# Altium PCB UV16 PDU.PcbDoc
Units mm, origin at the board's own origin, x right, y up, seen from the top; angles counter-clockwise.
Board outline 100 x 90 mm, 2 copper layers (Top Layer, Bottom Layer), stack 1.595 mm thick; 66 components, 57 nets, 215 pads, 97 vias.
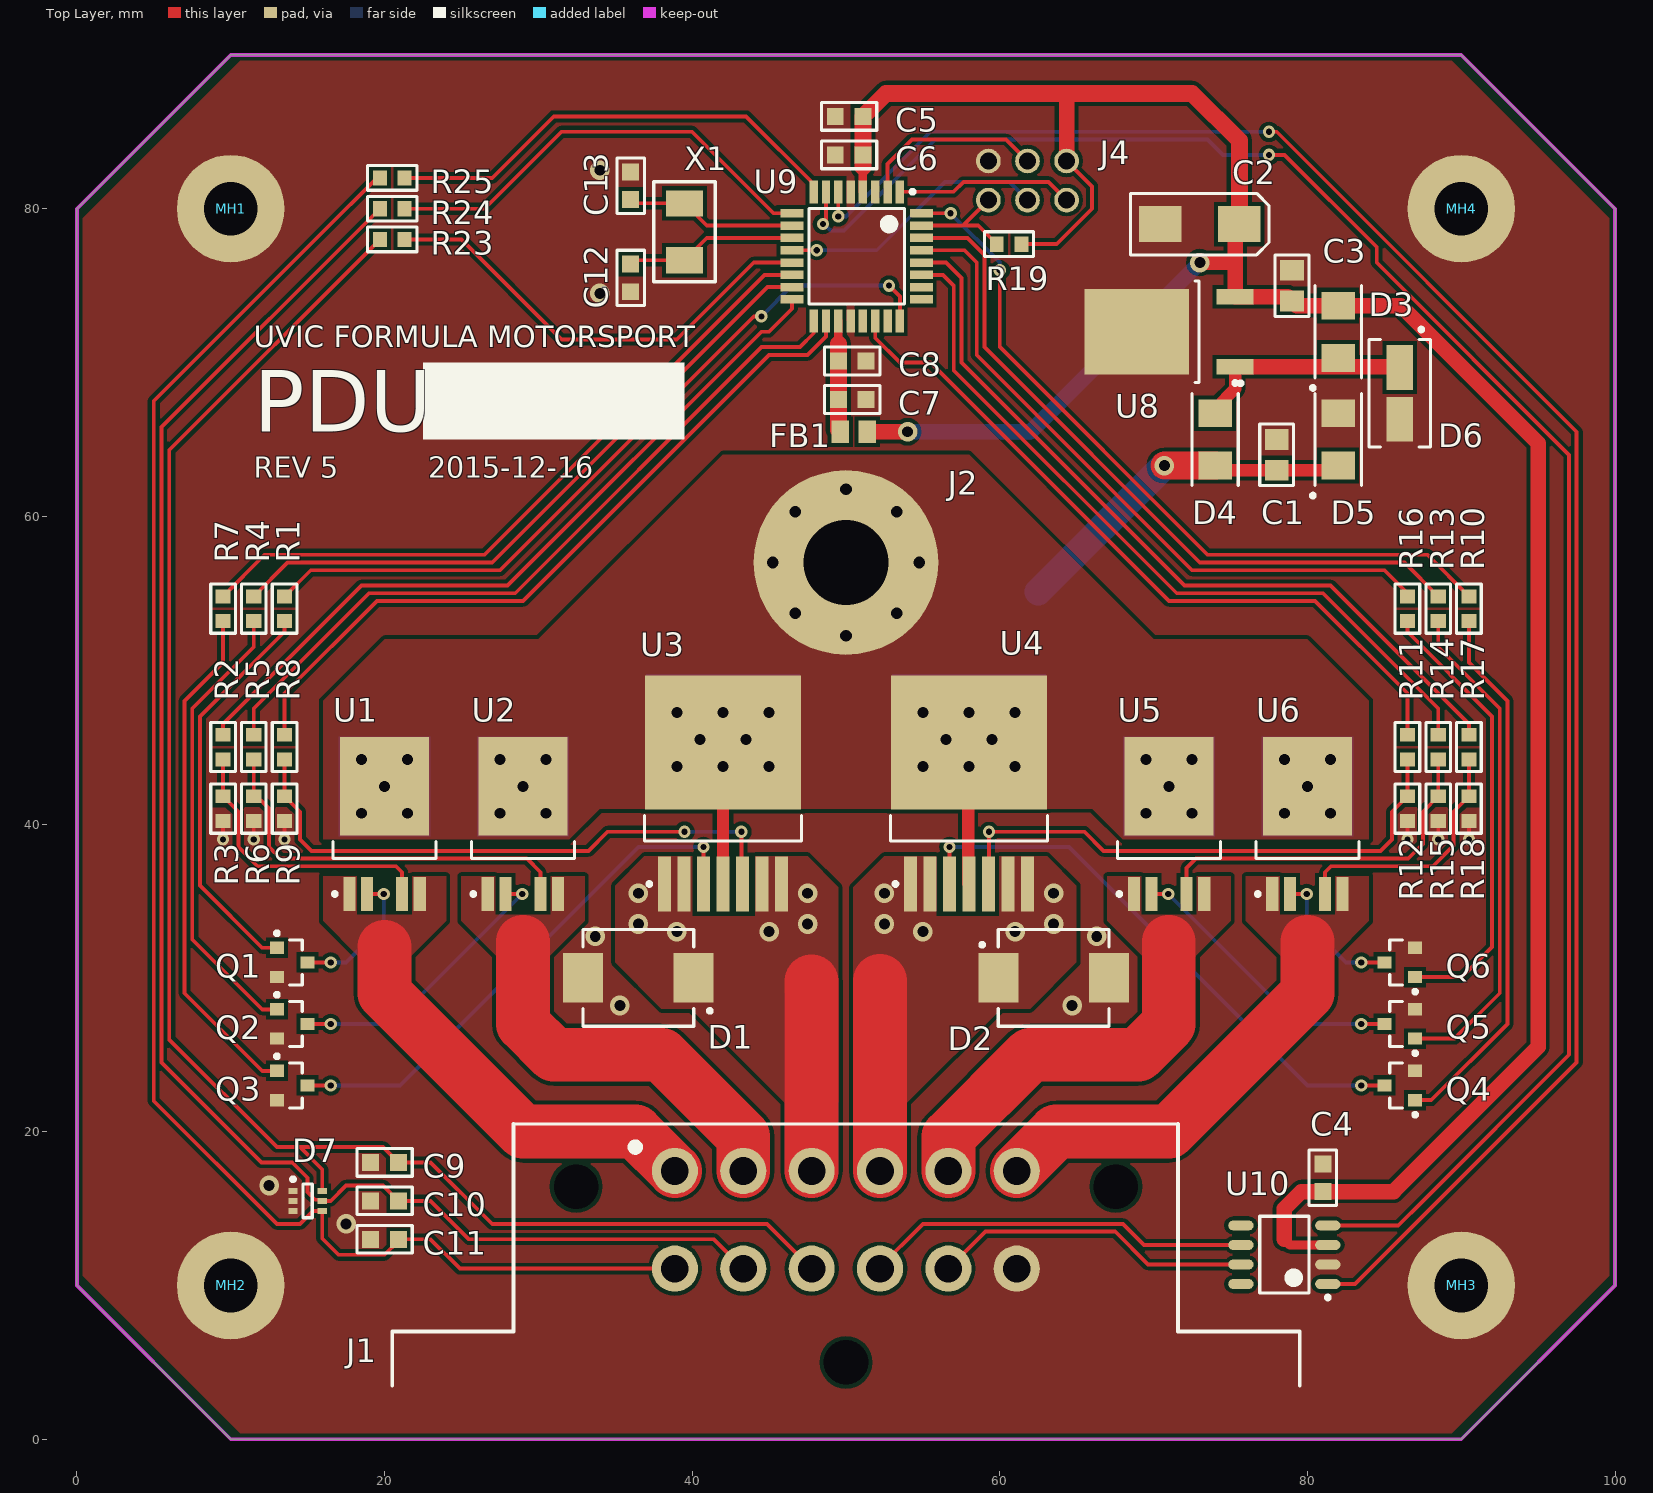
[diagram p0: Top Layer view]
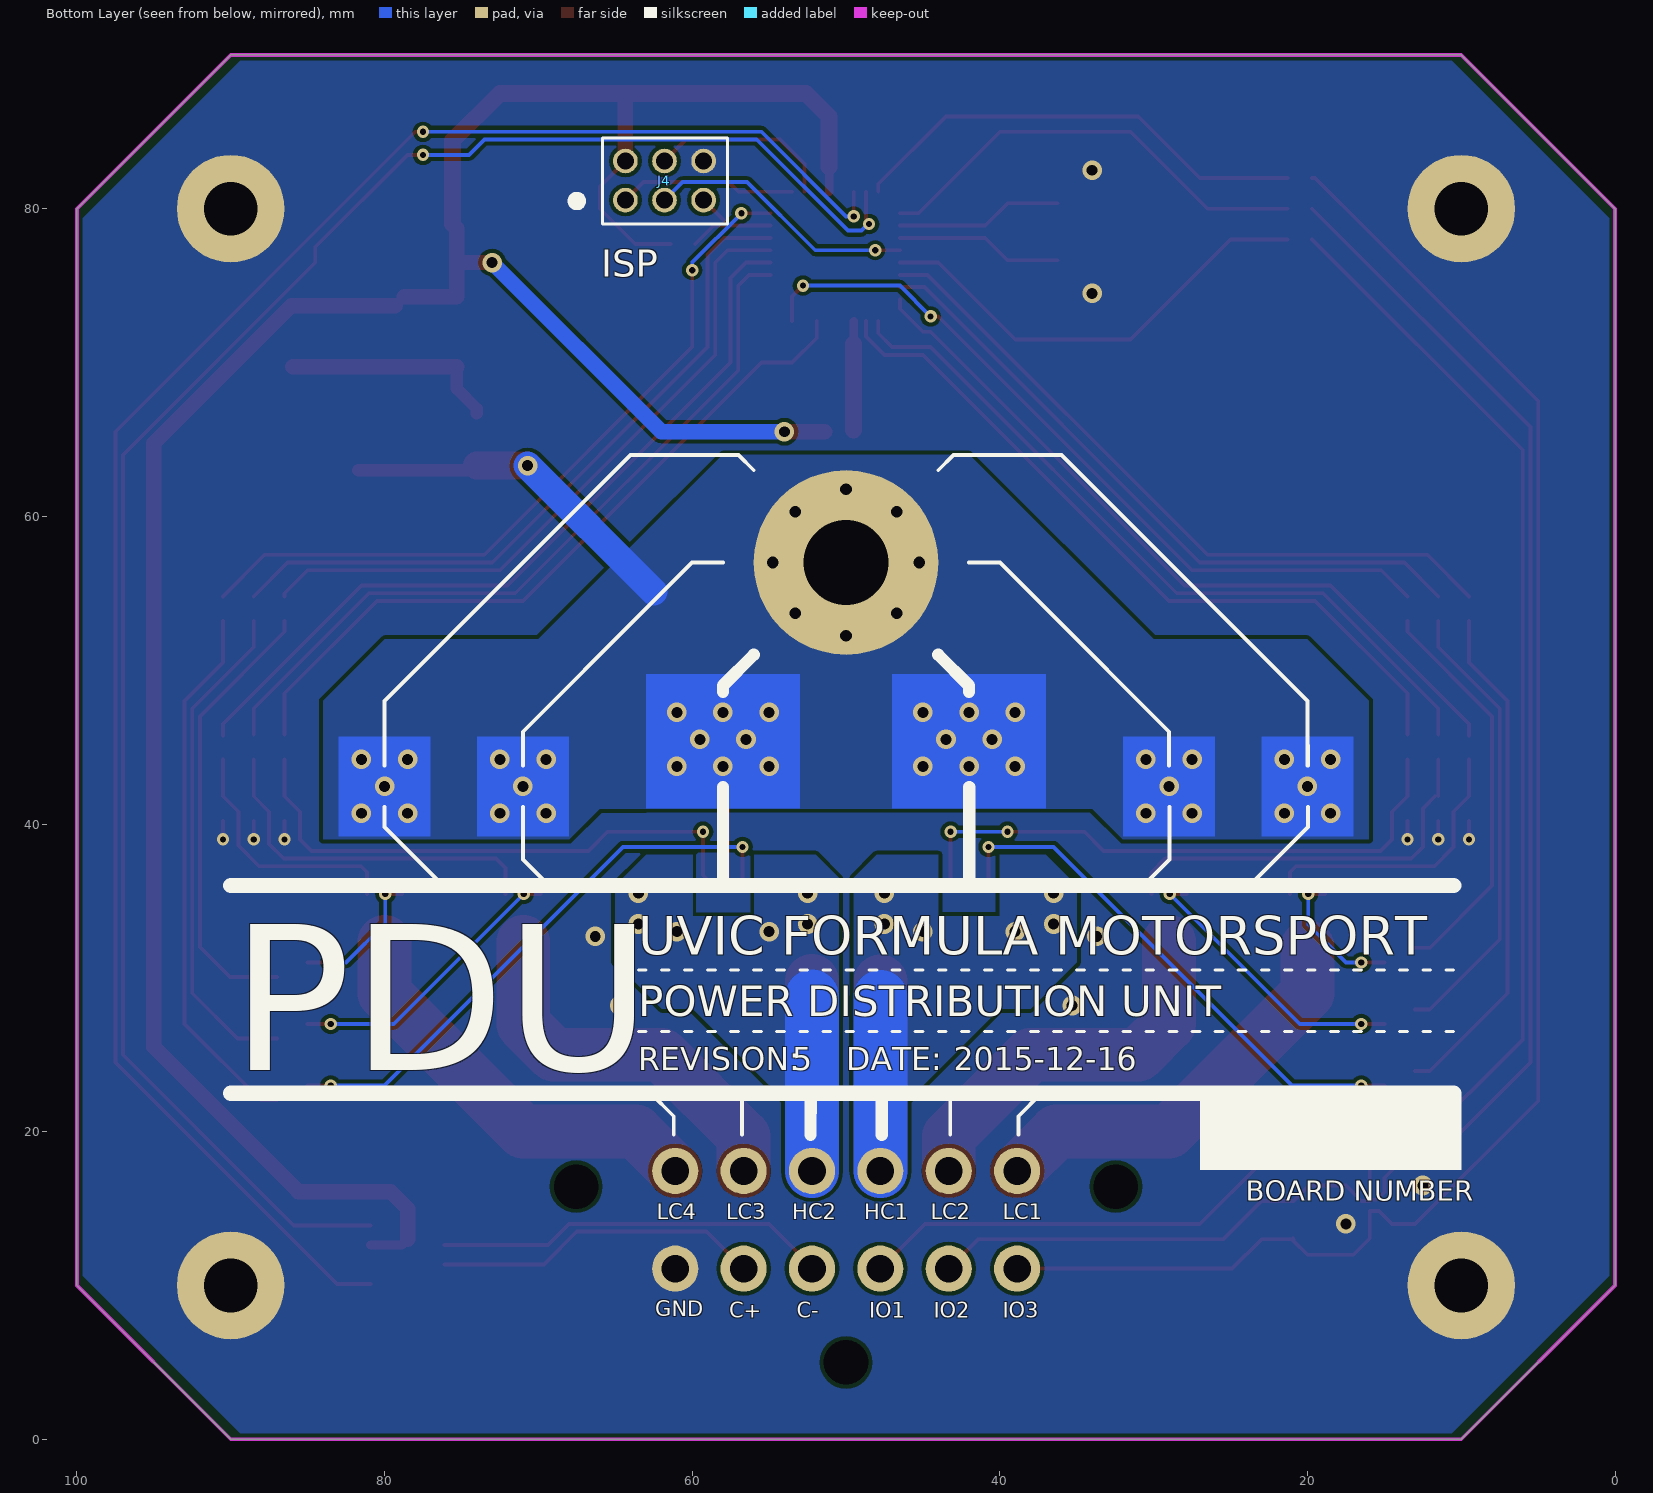
[diagram p1: Bottom Layer view, seen from below]

## Layer stack, top to bottom
Top Solder: solder mask 0.0254, Solder Resist, Dk 3.5
Top Layer: signal copper 0.0356
Dielectric 1: dielectric 1.524, FR-4, Dk 4.8
Bottom Layer: signal copper 0.0356
Bottom Solder: solder mask 0.0254, Solder Resist, Dk 3.5

## Board outline
15,0 10,0 0,10 0,80 10,90 90,90 100,80 100,10 90,0

## Design rules (kind name [scope] priority, off if disabled: settings)
Clearance [All] p1: gap=0.25
Height [All] p1: minheight=0 maxheight=254 prefheight=12.7
HoleSize [All] p1: absolutevalues=TRUE maxlimit=6.3 minlimit=0.3 maxpercent=80.000 minpercent=20.000
MinimumSolderMaskSliver [All] p1: minsoldermaskwidth=0.05
PolygonConnect [All] p1: connectstyle=Direct reliefconductorwidth=0.254 reliefentries=4 polygonreliefangle="90 Angle" airgapwidth=0.254
RoutingVias [All] p1: holewidth=0.711 width=1.27 viastyle="Through Hole" minholewidth=0.4 minwidth=0.8 maxholewidth=0.711 maxwidth=1.27
SilkToSilkClearance [All] p1: silktosilkclearance=0.2
SilkToSolderMaskClearance [IsPad] p1: minsilkscreentomaskgap=0.15 clearancetoexposedcopper=TRUE
SolderMaskExpansion [All] p1: expansion=0.1
Width [All] p1: maxlimit=20 minlimit=0.25 preferedwidth=0.254
25 further rules are at their usual default settings.

## Classes and differential pairs
component class Microcontroller: C1 C2 C3 C4 C5 C6 C7 C8 C9 C10 C11 C12 C13 D3 D4 D5 D6 D7 FB1 R19 R23 R24 R25 U8 U9 U10 X1
component class Drivers: D1 D2 Q1 Q2 Q3 Q4 Q5 Q6 R1 R2 R3 R4 R5 R6 R7 R8 R9 R10 R11 R12 R13 R14 R15 R16 R17 R18 U1 U2 U3 U4 U5 U6
component class Connectors: J1 J2 J4 MH1 MH2 MH3 MH4

## Components (designator, comment, footprint, x,y, rotation, side; value= is the part's Value field where it differs from the comment)
C1 "1nF" CAP-0805-M 78,64 r270 top
C2 "3.3µF" CAP-TANT-C-M 73,79 r0 top
C3 "1µF" CAP-0805-M 79,75 r270 top
C4 "1µF" CAP-0603-M 81,17 r270 top
C5 "1µF" CAP-0603-M 50.2,86 r0 top
C6 "100nF" CAP-0603-M 50.2,83.5 r0 top
C7 "1µF" CAP-0603-M 50.4,67.6 r180 top
C8 "100nF" CAP-0603-M 50.4,70.1 r180 top
C9 "100nF" CAP-0603-M 20,18 r0 top
C10 "100nF" CAP-0603-M 20,15.5 r0 top
C11 "100nF" CAP-0603-M 20,13 r0 top
C12 "12pF" CAP-0603-M 36,75.5 r90 top
C13 "12pF" CAP-0603-M 36,81.5 r270 top
D1 "ES3D" DIOM6959X26M 36.5,30 r180 top
D2 "ES3D" DIOM6959X26M 63.5,30 r0 top
D3 "S1JFL" DIOM3617X11M 82,72 r90 top
D4 "S1JFL" DIOM3617X11M 74,65 r270 top
D5 "S1JFL" DIOM3617X11M 82,65 r90 top
D6 "SMAZ16-13-F" DIOM4326X23M 86,68 r270 top
D7 "BZX84C5V6TS" SOT65P210X110-6N 15,15.5 r0 top
FB1 "BLM21AG102SH1D" INDC2012X11N 50.5,65.5 r180 top
J1 "DT13-12P" DT13-12P 50,5 r0 top locked
J2 "M5 Hole" M5HOLE 50,57 r0 top
J4 "M20-9980346" M20-9980346 61.8,83.1 r180 bottom
MH1 "M3 x 0.5" MH-M3-0.5 10,80 r0 top
MH2 "M3 x 0.5" MH-M3-0.5 10,10 r0 top
MH3 "M3 x 0.5" MH-M3-0.5 90,10 r0 top
MH4 "M3 x 0.5" MH-M3-0.5 90,80 r0 top
Q1 "MMBT3904" SOT23-3 14,31 r0 top
Q2 "MMBT3904" SOT23-3 14,27 r0 top
Q3 "MMBT3904" SOT23-3 14,23 r0 top
Q4 "MMBT3904" SOT23-3 86,23 r180 top
Q5 "MMBT3904" SOT23-3 86,27 r180 top
Q6 "MMBT3904" SOT23-3 86,31 r180 top
R1 "330R" RES-0603-M 13.5,54 r270 top
R2 "5K6" RES-0603-M 9.5,45 r270 top
R3 "1K" RES-0603-M 9.5,41 r90 top
R4 "330R" RES-0603-M 11.5,54 r270 top
R5 "5K6" RES-0603-M 11.5,45 r270 top
R6 "1K" RES-0603-M 11.5,41 r90 top
R7 "330R" RES-0603-M 9.5,54 r270 top
R8 "5K6" RES-0603-M 13.5,45 r270 top
R9 "1K" RES-0603-M 13.5,41 r90 top
R10 "330R" RES-0603-M 90.5,54 r270 top
R11 "5K6" RES-0603-M 86.5,45 r270 top
R12 "1K" RES-0603-M 86.5,41 r90 top
R13 "330R" RES-0603-M 88.5,54 r270 top
R14 "5K6" RES-0603-M 88.5,45 r270 top
R15 "1K" RES-0603-M 88.5,41 r90 top
R16 "330R" RES-0603-M 86.5,54 r270 top
R17 "5K6" RES-0603-M 90.5,45 r270 top
R18 "1K" RES-0603-M 90.5,41 r90 top
R19 "10K" RES-0603-M 60.6,77.7 r0 top
R23 "1K" RES-0603-M 20.5,78 r180 top
R24 "1K" RES-0603-M 20.5,80 r180 top
R25 "1K" RES-0603-M 20.5,82 r180 top
U1 "BTS6133D" PG-TO220-5-11 20,40 r90 top
U2 "BTS6133D" PG-TO220-5-11 29,40 r90 top
U3 "BTS50055" P/PG-TO220-7-4 42,42 r90 top
U4 "BTS50055" P/PG-TO220-7-4 58,42 r90 top
U5 "BTS6133D" PG-TO220-5-11 71,40 r90 top
U6 "BTS6133D" PG-TO220-5-11 80,40 r90 top
U8 "LF50ABDT-TRY" TO-252-3 71,72 r180 top
U9 "ATMEGA16M1" 32-TQFP-7X7-0.8 50.7,76.9 r270 top
U10 "SN65HVDA1050AQDRQ1" SOIC127P600X175-8M 78.5,12 r180 top
X1 "8 MHz" "TXC 7A" 39.5,78.5 r270 top

## Footprints (in the part's own frame and the unit in brackets; to place one, negate y for a bottom-side part, rotate by r counter-clockwise, add the part's x,y. Pads: shape width x height; smd on the part's side, far side on the other; paste and mask are expansions set on the pad)
32-TQFP-7X7-0.8 [mm] "Thin QFP, 32-Leads, Body 7x7mm, Pitch 0.8mm, IPC Medium Density"
  rect 1.5x0.55 smd: 1(-4.2,2.8) 2(-4.2,2) 3(-4.2,1.2) 4(-4.2,0.4) 5(-4.2,-0.4) 6(-4.2,-1.2) 7(-4.2,-2) 8(-4.2,-2.8) 17(4.2,-2.8) 18(4.2,-2) 19(4.2,-1.2) 20(4.2,-0.4) 21(4.2,0.4) 22(4.2,1.2) 23(4.2,2) 24(4.2,2.8)
  rect 0.55x1.5 smd: 9(-2.8,-4.2) 10(-2,-4.2) 11(-1.2,-4.2) 12(-0.4,-4.2) 13(0.4,-4.2) 14(1.2,-4.2) 15(2,-4.2) 16(2.8,-4.2) 25(2.8,4.2) 26(2,4.2) 27(1.2,4.2) 28(0.4,4.2) 29(-0.4,4.2) 30(-1.2,4.2) 31(-2,4.2) 32(-2.8,4.2)
  silkscreen extent -4.32,-3.1 3.1,3.75, body extent -4.5,-4.5 4.5,4.5, height 1.2
CAP-0603-M [mm] "Chip Capacitor, Body 1.6x0.8mm, Height 1.0mm, IPC Low Density"
  rect 1.1x1.1 smd: 1(-0.9,0) 2(0.9,0)
  silkscreen extent -1.8,-0.9 1.8,0.9, body extent -0.87,-0.47 0.88,0.48, height 1
CAP-0805-M [mm] "Chip Capacitor, Body 2.0x1.2mm, Height 1.55mm, IPC Low Density"
  rect 1.35x1.55 smd: 1(-1,0) 2(1,0)
  silkscreen extent -2,-1.1 2,1.1, body extent -1.1,-0.72 1.1,0.72, height 1.55
CAP-TANT-C-M [mm] "Molded Capacitor, 2-Leads, Body 6.00x3.20mm, IPC Low Density"
  rect 2.77x2.35 smd: 1(-2.57,0) 2(2.57,0)
  silkscreen extent -4.5,-2 4.5,2, body extent -3.37,-1.75 3.37,1.75, height 2.8
DIOM3617X11M [mm] "Molded Diode, 2-Leads, Body 3.60x1.72mm, IPC Low Density"
  rect 1.8x2.2 smd: 1(-1.7,0) 2(1.7,0)
  silkscreen extent -3.77,-1.5 3,1.77, body extent -1.95,-0.97 1.95,0.97, height 1.08
DIOM4326X23M [mm] "Molded Diode, 2-Leads, Body 4.30x2.60mm, IPC Low Density"
  rect 2.9x1.7 smd: 1(-1.675,0) 2(1.675,0)
  silkscreen extent -4.27,-2 3.5,2, body extent -2.3,-1.46 2.3,1.46, height 2.3
DIOM6959X26M [mm] "Molded Diode, 2-Leads, Body 6.88x5.90mm, IPC Low Density"
  rect 2.6x3.2 smd: 1(-3.6,0) 2(3.6,0)
  silkscreen extent -4.78,-3.15 3.6,3.15, body extent -3.57,-3.13 3.57,3.13, height 2.65
DT13-12P [mm]
  round 3 hole 1.8: 1(-11.124,12.446) 2(-6.679,12.446) 3(-2.234,12.446) 4(2.211,12.446) 5(6.656,12.446) 6(11.101,12.446) 7(-11.124,6.096) 8(-6.679,6.096) 9(-2.234,6.096) 10(2.211,6.096) 11(6.656,6.096) 12(11.101,6.096)
  round 0 hole 2.9 unplated paste+0: M1(0,0) M2(-17.539,11.43) M3(17.539,11.43)
  silkscreen extent -29.5,-1.5 29.5,15.49, body extent -29.6,-24 29.6,15.5, height 35.63
INDC2012X11N [mm] "Chip Inductor, 2-Leads, Body 2.00x1.25mm, IPC Medium Density"
  rect 1.13x1.47 smd: 1(-0.885,0) 2(0.885,0)
  body extent -1.1,-0.72 1.1,0.72, height 1.05
M5HOLE [mm]
  round 12 hole 5.5: 0(0,0)
M20-9980346 [mm]
  round 1.6 hole 1.1: 1(-2.54,-2.54) 2(-2.54,0) 3(0,-2.54) 4(0,0) 5(2.54,-2.54) 6(2.54,0)
  silkscreen extent -4.04,-4.1 4.1,1.5, body extent -3.79,-3.84 3.83,1.2, height 7.13
MH-M3-0.5 [mm]
  round 7 hole 3.5: 0(0,0)
P/PG-TO220-7-4 [mm] "DPAK, 7-Leads, Body 10x9.25mm, Pitch 1.27mm, IPC Low Density"
  rect 3.55x0.85 smd: 1(-5.9,3.81) 2(-5.9,2.54) 3(-5.9,1.27) 4(-5.9,0) 5(-5.9,-1.27) 6(-5.9,-2.54) 7(-5.9,-3.81)
  rect 8.7x10.15 smd: 8(3.3,0)
  Bottom Layer region: -1,-5 7.75,-5 7.75,5 -1,5
  silkscreen extent -6.02,-5.1 -1.45,5.1, body extent -7.28,-5 6.64,5, height 4.5
PG-TO220-5-11 [mm] "D-PAK, 5-Pads, Body 6.21x6.69mm (max), IPC Medium Density"
  rect 2.2x0.8 smd: 1(-4.55,2.28) 2(-4.55,1.14) 4(-4.55,-1.14) 5(-4.55,-2.28)
  rect 6.4x5.8 smd: 6(2.45,0)
  Bottom Layer region: -0.8,-3 5.7,-3 5.7,3 -0.8,3
  silkscreen extent -4.67,-3.35 -1.15,3.35, body extent -4.91,-3.25 4.91,3.25, height 2.3
RES-0603-M [mm] "Chip Resistor, Body 1.6x0.8mm, IPC Medium Density"
  rect 0.9x1 smd: 1(-0.8,0) 2(0.8,0)
  silkscreen extent -1.6,-0.8 1.6,0.8, body extent -0.85,-0.47 0.85,0.47, height 0.6
SOIC127P600X175-8M [mm] "SOIC, 8-Leads, Body 4.90x3.90mm, Pitch 1.27mm, IPC Low Density"
  oval 1.65x0.65 smd: 1(-2.825,1.905) 2(-2.825,0.635) 3(-2.825,-0.635) 4(-2.825,-1.905) 5(2.825,-1.905) 6(2.825,-0.635) 7(2.825,0.635) 8(2.825,1.905)
  silkscreen extent -2.95,-2.5 1.6,2.9, body extent -3,-2.5 3,2.5, height 1.75
SOT23-3 [mm] "SOT23, 3-Leads, Body 2.92x1.3mm, Pitch 0.95mm"
  rect 0.9x0.8 smd: 1(-1,0.95) 2(-1,-0.95) 3(1,0)
  silkscreen extent -1.12,-1.46 0.65,2.02, body extent -0.65,-1.46 0.65,1.46, height 1.11
SOT65P210X110-6N [mm] "SOT23, 6-Leads, Body 2.00x2.10mm, Pitch 0.65mm, IPC Medium Density"
  rect 0.6x0.4 smd: 1(-0.95,0.65) 2(-0.95,0) 3(-0.95,-0.65) 4(0.95,-0.65) 5(0.95,0) 6(0.95,0.65)
  silkscreen extent -1.07,-1.1 0.3,1.53, body extent -1.1,-1.1 1.1,1.1, height 1.1
TO-252-3 [mm] "D-PAK, 4-Leads, Body 6.1x6.5mm, Pitch 2.28mm, Lead Span 9.7mm, IPC Low Density"
  rect 2.4x1 smd: 1(-4.3,2.28) 3(-4.3,-2.28)
  rect 6.8x5.55 smd: 4(2.1,0)
  silkscreen extent -4.43,-3.3 -1.7,3.45, body extent -4.7,-3.25 5,3.25, height 2.4
"TXC 7A" [mm] "SMD Crystal"
  rect 1.7x2.4 smd: 1(-1.85,0) 2(1.85,0)
  silkscreen extent -3.25,-2 3.25,2, body extent -2.57,-1.68 2.58,1.68, height 1.35

## Part data
C1: library part CC0805KRX7RABB102
C2: library part T491C335M025AT
C3: library part CC0805KKX7R6BB105
C4 C5 C7: library part CC0603KRX7R6BB105
C6 C8 C9 C10 C11: library part CC0603KPX7R7BB104
C12 C13: library part CC0603JRNPO9BN120
J1: "DT Series 12-Pin Right Angle PCB Mount Receptacle"
J2: library part M5HOLE
J4: "2.54mm Header 2x3-Pin"
MH1 MH2 MH3 MH4: library part MH-M3-0.5
R1 R4 R7 R10 R13 R16: library part RC0603FR-07330RL
R2 R5 R8 R11 R14 R17: library part RC0603FR-075K6L
R3 R6 R9 R12 R15 R18 R23 R24 R25: library part RC0603FR-071KL
R19: library part RC0603FR-0710KL
U9: library part ATMEGA16M1-15AZ
U10: "CAN transceiver"
X1: library part 7A-8.000MAAE-T, "SMD Crystal Oscillator 12 pF"

## Via types
v1: diameter 1.27, hole 0.711, Top Layer to Bottom Layer, 38 vias
v2: diameter 0.8, hole 0.4, Top Layer to Bottom Layer, tented both sides, 30 vias
v3: diameter 1.27, hole 0.711, Top Layer to Bottom Layer, tented both sides, 21 vias
v4: diameter 1.27, hole 0.75, Top Layer to Bottom Layer, 8 vias

## Nets (pads, with @x,y where several pads share a name; then routed paths per layer and width w, separated by ;. In a path a pad name is that pad's centre, name@x,y a point inside that pad or via, vN(x,y) a via of type N, cw(c..) or ccw(c..) an arc to the next point about the centre after c; other vN are vias at no path point)
+5V: C2.2 C3.2 C4.2 C5.2 C6.2 D3.2 FB1.1 J4.2 R19.2 U8.3 U9.4 U10.3 | length 170.4
  Top Layer w0.25: R19.2 63.7,77.7 66,80 66,81.44 J4.2
  Top Layer w0.55: U9.4 51.1,82.456
  Top Layer w0.6: 78.5,13 78.865,12.635 U10.3@80.9,12.635
  Top Layer w1: FB1.1 v3(54,65.5) ; J4.2 64.34,87.34 ; v3(73,76.5) 75.295,76.5 ; C2.2@75.3,78.73 U8.3 C3.2@78.72,74.28 ; 78.5,13 78.5,15 79.6,16.1 C4.2 85.6,16.1 95,25.5 95,64.763 86.063,73.7 D3.2 C3.2@79.3,73.7
  Top Layer w1.1: 51.1,82.7 C6.2 C5.2 52.6,87.5 72.5,87.5 75.57,84.43 C2.2
  Bottom Layer w1: v3(54,65.5) 62,65.5 v3(73,76.5)
+5V_A: C7.2 C8.2 FB1.2 U9.19 | length 7.1
  Top Layer w0.55: 49.5,71.192 U9.19
  Top Layer w1.1: FB1.2@49.5,65.615 C7.2 C8.2 49.5,71.192
+12V: C1.2 D4.2 D5.1 J2.0 U1.6 U2.6 U3.4 U3.8 U4.4 U4.8 U5.6 U6.6 | length 41
  Top Layer w0.8: U3.4 v1(42,43.75) U3.8 ; U4.4 57.95,36.15 57.95,43.7 v1(58,43.75) U4.8 ; D4.2@74,63 C1.2 D5.1@81.7,63
  Top Layer w1.8: v3(70.7,63.3) D4.2
  Bottom Layer w1.8: 62.5,55.1 v3(70.7,63.3)
  other v1: 18.5,40.7 21.5,40.7 27.5,40.7 30.5,40.7 69.5,40.7 72.5,40.7 78.5,40.7 81.5,40.7 20,42.45 29,42.45 71,42.45 80,42.45 39,43.75 45,43.75 55,43.75 61,43.75 18.5,44.2 21.5,44.2 27.5,44.2 30.5,44.2 69.5,44.2 72.5,44.2 78.5,44.2 81.5,44.2 40.5,45.5 43.5,45.5 56.5,45.5 59.5,45.5 39,47.25 42,47.25 45,47.25 55,47.25 58,47.25 61,47.25
  other v4: 50,52.25 46.7,53.7 53.3,53.7 45.25,57 54.75,57 46.7,60.3 53.3,60.3 50,61.75
CAN_H: J1.11 U10.7 | length 21.3
  Top Layer w0.25: J1.11 59.06,13.5 67.5,13.5 69.635,11.365 U10.7@76.1,11.365
CAN_L: J1.10 U10.6 | length 25.9
  Top Layer w0.25: J1.10 52.096,11.096 55,14 68,14 69.365,12.635 U10.6@76.1,12.635
CAN_RX: U9.7 U10.4 | length 122.1
  Top Layer w0.25: v2(48.5,79) 48.7,79.2 U9.7 ; v2(77.5,83.5) 78.5,83.5 84.5,77.5 84.5,76.5 97,64 97,25 87.5,15.5 85.905,13.905 U10.4@80.9,13.905
  Bottom Layer w0.25: v2(48.5,79) 48.575,79 49,78.575 49.879,78.575 55.804,84.5 73.5,84.5 74.5,83.5 v2(77.5,83.5)
CAN_TX: U9.6 U10.1 | length 123.5
  Top Layer w0.25: v2(49.5,79.5) U9.6 ; v2(77.5,85) 78,85 97.5,65.5 97.5,24.5 83.095,10.095 U10.1@80.9,10.095
  Bottom Layer w0.25: v2(49.5,79.5) 50,79.5 55.5,85 v2(77.5,85)
GND: C1.1 C2.1 C3.1 C4.1 C5.1 C6.1 C7.1 C8.1 C9.1 C10.1 C11.1 C12.1 C13.1 D1.2 D2.2 D5.2 D6.2 D7.1 D7.2 D7.3 J1.12 J4.6 MH1.0 MH2.0 MH3.0 MH4.0 Q1.2 Q2.2 Q3.2 Q4.2 Q5.2 Q6.2 R3.1 R6.1 R9.1 R12.1 R15.1 R18.1 U8.4 U9.5 U9.20 U10.2 | length 7.2
  Top Layer w0.25: v2(9.5,39) R3.1 ; v2(11.5,39) R6.1 ; v2(13.5,39) R9.1 ; v2(86.5,39) R12.1 ; v2(88.5,39) R15.1 ; v2(90.5,39) R18.1
  other v1: 34,74.5 34,82.5
  other v3: 17.5,14 12.5,16.5 35.3,28.2 64.7,28.2 33.7,32.7 66.3,32.7
IN1: C9.2 D7.6 J1.9 R23.2 | length 109.1
  Top Layer w0.25: D7.6 15.95,17.55 14.5,19 ; R23.2 6,64.3 6,26 13,19 14.5,19 ; J1.9 44.862,14 27,14 23,18 C9.2 19.9,19 14.5,19
IN2: C10.2 D7.5 J1.8 R24.2 | length 106.1
  Top Layer w0.25: R24.2 5.5,65.8 5.5,24.5 12,18 14,18 15,17 15,16.07 15.495,15.575 15.875,15.575 D7.5 16.5,15.5 17.5,16.5 19.9,16.5 C10.2 23,15.5 25.5,13 41.417,13 J1.8
IN3: C11.2 D7.4 J1.7 R25.2 | length 107.2
  Top Layer w0.25: R25.2 19.5,82 16,78.5 5,67.5 5,22 13,14 14.5,14 15.35,14.85 D7.4 15.95,13.05 17,12 20,12 20.9,12.9 C11.2 ; C11.2@20.95,13.05 21,13 23,13 24.904,11.096 J1.7
IS_HC1: R8.1 U9.18 | length 48.5
  Top Layer w0.25: R8.1 13.5,48.5 19.5,54.5 29,54.5 45,70.5 47.5,70.5 48.7,71.7 U9.18
IS_HC2: R11.1 U9.22 | length 48
  Top Layer w0.25: U9.22 51.9,71.6 53.5,70 55.5,70 71,54.5 80.5,54.5 86.5,48.5 R11.1
IS_LC1: R2.1 U9.16 | length 49.5
  Top Layer w0.25: R2.1@9.5,45.75 9.5,46.5 18.5,55.5 28,55.5 44.5,72 45,72 46.5,73.5 U9.16
IS_LC2: R5.1 U9.17 | length 49
  Top Layer w0.25: R5.1 11.5,47.5 19,55 28.5,55 44.5,71 47,71 47.9,71.9 U9.17
IS_LC3: R14.1 U9.27 | length 50.2
  Top Layer w0.25: U9.27 56.3,75.7 57,75 57,69.5 71.5,55 81,55 88.5,47.5 R14.1
IS_LC4: R17.1 U9.28 | length 52
  Top Layer w0.25: U9.28 56.5,76.5 57.5,75.5 57.5,70 72,55.5 81.5,55.5 90.5,46.5 R17.1@90.5,45.75
MCU_IN1: R23.1 U9.13 | length 30
  Top Layer w0.25: R23.1 25,78 31.5,71.5 39,71.5 44,76.5 U9.13
MCU_IN2: R24.1 U9.9 | length 29.5
  Top Layer w0.25: R24.1 26.5,80 31.5,85 40,85 45.3,79.7 U9.9
MCU_IN3: R25.1 U9.8 | length 30.6
  Top Layer w0.25: R25.1 27,82 31,86 43.5,86 47.9,81.6 U9.8
MISO: J4.1 U9.1 | length 11.6
  Top Layer w0.25: U9.1 57,81.1 57.635,81.735 63.165,81.735 J4.1
MOSI: J4.4 U9.2 | length 12.1
  Top Layer w0.25: U9.2 52.7,82.9 54.3,84.5 60.4,84.5 J4.4
NetC12_2: C12.2 U9.11 X1.2 | length 10.9
  Top Layer w0.25: C12.2@36.25,76.65 X1.2 40.95,78.1 U9.11
NetC13_2: C13.2 U9.10 X1.1 | length 10.9
  Top Layer w0.25: C13.2@36.25,80.35 X1.1 40.95,78.9 U9.10
NetD3_1: D3.1 D4.1 D6.1 U8.1 | length 14.2
  Top Layer w0.8: D4.1 74,67 75.3,68.3 U8.1
  Top Layer w1: U8.1 D6.1@85.955,69.72
NetQ1_1: Q1.1 R1.2 | length 26.2
  Top Layer w0.25: Q1.1 12.05,31.95 8,36 8,47 13.5,52.5 R1.2
NetQ1_3: Q1.3 U1.2 | length 9.1
  Top Layer w0.25: Q1.3 v2(16.5,31) ; U1.2 v2(19.95,35.45)
  Bottom Layer w0.25: v2(16.5,31) 17.5,31 19.95,33.45 v2(19.95,35.45)
NetQ2_1: Q2.1 R4.2 | length 29.7
  Top Layer w0.25: R4.2 11.5,51.5 7.5,47.5 7.5,32.5 12.05,27.95 Q2.1
NetQ2_3: Q2.3 U2.2 | length 18.5
  Top Layer w0.25: Q2.3 v2(16.5,27) ; U2.2 v2(28.95,35.45)
  Bottom Layer w0.25: v2(16.5,27) 20.5,27 v2(28.95,35.45)
NetQ3_1: Q3.1 R7.2 | length 33.3
  Top Layer w0.25: R7.2 9.5,50.5 7,48 7,29 12.05,23.95 Q3.1
NetQ3_3: Q3.3 U3.3 | length 34.6
  Top Layer w0.25: Q3.3 v2(16.5,23) ; U3.3 v2(40.73,38.51)
  Bottom Layer w0.25: v2(16.5,23) 21,23 36.51,38.51 v2(40.73,38.51)
NetQ4_1: Q4.1 R10.2 | length 35.3
  Top Layer w0.25: Q4.1 88.05,22.05 93,27 93,48 90.5,50.5 R10.2
NetQ4_3: Q4.3 U4.3 | length 37.1
  Top Layer w0.25: U4.3 v2(56.73,38.51) ; v2(83.5,23) Q4.3
  Bottom Layer w0.25: v2(56.73,38.51) 64.49,38.51 80,23 v2(83.5,23)
NetQ5_1: Q5.1 R13.2 | length 32.6
  Top Layer w0.25: Q5.1 89.55,26.05 92.5,29 92.5,47.5 88.5,51.5 R13.2
NetQ5_3: Q5.3 U5.2 | length 18.6
  Top Layer w0.25: U5.2 v2(70.95,35.45) ; v2(83.5,27) Q5.3
  Bottom Layer w0.25: v2(70.95,35.45) 79.4,27 v2(83.5,27)
NetQ6_1: Q6.1 R16.2 | length 29.3
  Top Layer w0.25: R16.2 86.5,52.5 92,47 92,32 90.05,30.05 Q6.1
NetQ6_3: Q6.3 U6.2 | length 9.1
  Top Layer w0.25: U6.2 v2(79.95,35.45) ; v2(83.5,31) Q6.3
  Bottom Layer w0.25: v2(79.95,35.45) 79.95,33.55 82.5,31 v2(83.5,31)
NetR2_2: R2.2 R3.2 U1.4 | length 18.8
  Top Layer w0.25: R2.2 R3.2 10.5,40.8 10.5,38.5 11.75,37.25 20.75,37.25 21.14,36.86 U1.4
NetR5_2: R5.2 R6.2 U2.4 | length 25.8
  Top Layer w0.25: R6.2 R5.2 ; R6.2@11.7,41.8 12.5,41 12.5,38.5 13.25,37.75 29.25,37.75 30.14,36.86 U2.4
NetR8_2: R8.2 R9.2 U3.5 | length 38.6
  Top Layer w0.25: R8.2 R9.2 14.5,40.8 14.5,39 15.25,38.25 33.25,38.25 34.5,39.5 v2(39.5,39.5) ; v2(43.2,39.5) 43.2,36.17 U3.5
  Bottom Layer w0.25: v2(39.5,39.5) v2(43.2,39.5)
NetR11_2: R11.2 R12.2 U4.5 | length 36.3
  Top Layer w0.25: U4.5 59,36.37 59.3,36.67 v2(59.3,39.5) 65.5,39.5 66.75,38.25 84.75,38.25 85.5,39 85.5,40.8 R12.2 R11.2
NetR14_2: R14.2 R15.2 U5.4 | length 23.6
  Top Layer w0.25: U5.4 72.14,37.14 72.75,37.75 86.55,37.75 87.5,38.7 87.5,40.8 R15.2 R14.2
NetR17_2: R17.2 R18.2 U6.4 | length 16.5
  Top Layer w0.25: U6.4 81.14,36.86 81.53,37.25 88.15,37.25 89.5,38.6 89.5,40.8 R18.2 R17.2
OUT_HC1: D1.1 J1.3 U3.1 U3.2 U3.6 U3.7 | length 23.6
  Top Layer w3.5: J1.3 47.766,29.766
  Bottom Layer w3.5: J1.3 47.766,28.766
  other v3: 39,33 45,33 36.5,33.5 47.5,33.5 36.5,35.5 47.5,35.5
OUT_HC2: D2.1 J1.4 U4.1 U4.2 U4.6 U4.7 | length 23.7
  Top Layer w3.5: J1.4 52.211,29.789
  Bottom Layer w3.5: J1.4 52.211,28.789
  other v3: 55,33 61,33 52.5,33.5 63.5,33.5 52.5,35.5 63.5,35.5
OUT_LC1: J1.1 U1.1 U1.5 | length 26.7
  Top Layer w3.5: 20,32 20,29 29,20 36.322,20 J1.1
OUT_LC2: J1.2 U2.1 U2.5 | length 24.9
  Top Layer w3.5: 29,32.35 29,27 31,25 38,25 43.321,19.679 J1.2
OUT_LC3: J1.5 U5.1 U5.5 | length 24.9
  Top Layer w3.5: J1.5 56.656,19.679 61.978,25 69,25 70.978,26.978 70.978,32.35
OUT_LC4: J1.6 U6.1 U6.5 | length 27
  Top Layer w3.5: J1.6 63.655,20 71,20 80,29 80,32.35
R\E\S\E\T\: J4.5 R19.1 U9.31 | length 7.7
  Top Layer w0.25: U9.31 57.6,78.9 ; J4.5 57.6,78.9 ; R19.1 58.6,78.9 57.6,78.9
SCK: J4.3 U9.12 | length 17.6
  Top Layer w0.25: U9.12 v2(48.1,77.3)
  Bottom Layer w0.25: v2(48.1,77.3) 52,77.3 56.435,81.735 60.625,81.735 J4.3
SW_HC1: R7.1 U9.14 | length 45.7
  Top Layer w0.25: R7.1 12.2,57.5 26.5,57.5 44.7,75.7 U9.14
SW_HC2: R10.1 U9.32 | length 49.1
  Top Layer w0.25: U9.32 v2(56.8,79.7) ; v2(60,76) 60,71 73.5,57.5 87.8,57.5 R10.1
  Bottom Layer w0.25: v2(56.8,79.7) 60,76.5 v2(60,76)
SW_LC1: R1.1 U9.24 | length 50.3
  Top Layer w0.25: R1.1 15.2,56.5 27.5,56.5 44,73 v2(44.5,73) ; v2(52.8,75) 53.5,74.3 U9.24
  Bottom Layer w0.25: v2(44.5,73) 46.5,75 v2(52.8,75)
SW_LC2: R4.1 U9.15 | length 43.3
  Top Layer w0.25: R4.1 13.7,57 27,57 44.9,74.9 U9.15
SW_LC3: R13.1 U9.30 | length 46.8
  Top Layer w0.25: U9.30 57.9,78.1 59,77 59,71 73,57 86.3,57 R13.1
SW_LC4: R16.1 U9.29 | length 44.6
  Top Layer w0.25: U9.29 57.7,77.3 58.5,76.5 58.5,70.5 72.5,56.5 85,56.5 86.5,55 R16.1
pads on no net: J1.M1 J1.M2 J1.M3 U9.3 U9.21 U9.23 U9.25 U9.26 U10.5 U10.8

## Polygon pours and split planes (outlines as drawn)
+12V on Top Layer "+12V_L01_P086" (solid, pour order 86): 42,64 58,64 70,52 80,52 84,48 84,39 68,39 66,41 34,41 32,39 16,39 16,48 20,52 30,52
OUT_LC3 on Top Layer "OUT_LC3_L01_P084" (solid, pour order 84): 69.2,36.6 69.2,34.1 72.8,34.1 72.8,36.6 75,36.6 75,33.7 72.7,31.4 69.3,31.4 67,33.7 67,36.6
OUT_LC4 on Top Layer "OUT_LC4_L01_P082" (solid, pour order 82): 78.2,36.6 78.2,34.1 81.8,34.1 81.8,36.6 84,36.6 84,33.7 81.7,31.4 78.3,31.4 76,33.7 76,36.6
OUT_HC2 on Top Layer "OUT_HC2_L01_P080" (solid, pour order 80): 59.978,37.9 62.178,37.9 63.078,37.9 64.978,36 64.978,31 61.978,28 60.978,28 60.078,28 53.978,21.9 50.478,21.9 50.478,35.9 52.478,37.9 55.878,37.9 55.878,34 59.978,34 59.978,37.9
OUT_HC1 on Top Layer "OUT_HC1_L01_P078" (solid, pour order 78): 40,37.9 37.8,37.9 36.9,37.9 35,36 35,31 38,28 39,28 39.9,28 46,21.9 49.5,21.9 49.5,35.9 47.5,37.9 44.1,37.9 44.1,34 40,34 40,37.9
OUT_LC2 on Top Layer "OUT_LC2_L01_P076" (solid, pour order 76): 27.2,36.6 27.2,34.1 30.8,34.1 30.8,36.6 33,36.6 33,33.7 30.7,31.4 27.3,31.4 25,33.7 25,36.6
OUT_LC1 on Top Layer "OUT_LC1_L01_P074" (solid, pour order 74): 18.2,36.6 18.2,34.1 21.8,34.1 21.8,36.6 24,36.6 24,33.7 21.7,31.4 18.3,31.4 16,33.7 16,36.6
GND on Top Layer "GND_L01_P102" (solid, pour order 102): 11,90 0,79 0,11 11,0 89,0 100,11 100,79 89,90
+12V on Bottom Layer "+12V_L02_P098" (solid, pour order 98): 42,64 58,64 70,52 80,52 84,48 84,39 68,39 66,41 34,41 32,39 16,39 16,48 20,52 30,52
OUT_HC2 on Bottom Layer "OUT_HC2_L02_P092" (solid, pour order 92): 59.978,38 63,38 65,36 65,31.022 61.978,28 59.978,28 53.978,22 50.478,22 50.478,36.5 51.978,38 55.978,38 55.978,34 59.978,34
OUT_HC1 on Bottom Layer "OUT_HC1_L02_P090" (solid, pour order 90): 40,38 37,38 35,36 35,31 38,28 40,28 46,22 49.5,22 49.5,36.5 48,38 44,38 44,34 40,34
GND on Bottom Layer "GND_L02_P100" (solid, pour order 100): 11,90 0,79 0,11 11,0 89,0 100,11 100,79 89,90

## Keep-outs
Keep-Out Layer:
  lines w0.254: 0,10 10,0 90,0 100,10 100,80 90,90 10,90 0,80 0,10

## Silkscreen, mask and mechanical layers (free items; w line width, h text height)
Top Overlay:
  rectangle: 22.5,65 39.5,70
  text "UVIC FORMULA MOTORSPORT" at 11.5,71 h1.41
  text "PDU" at 11.5,65.5 h4
  text "REV 5          2015-12-16" at 11.5,62.5 h1.35
Bottom Overlay:
  circle w0.6: c67.5,80.5 r0.3
  rectangle: 10,17.5 27,22.5
  lines w0.2: 10.5,26.5 11,26.5 ; 10.5,30.5 11,30.5 ; 12,26.5 12.5,26.5 ; 12,30.5 12.5,30.5 ; 13.5,26.5 14,26.5 ; 13.5,30.5 14,30.5 ; 15,26.5 15.5,26.5 ; 15,30.5 15.5,30.5 ; 16.5,26.5 17,26.5 ; 16.5,30.5 17,30.5 ; 18,26.5 18.5,26.5 ; 18,30.5 18.5,30.5 ; 19.5,26.5 20,26.5 ; 19.5,30.5 20,30.5 ; 21,26.5 21.5,26.5 ; 21,30.5 21.5,30.5 ; 22.5,26.5 23,26.5 ; 22.5,30.5 23,30.5 ; 24,26.5 24.5,26.5 ; 24,30.5 24.5,30.5 ; 25.5,26.5 26,26.5 ; 25.5,30.5 26,30.5 ; 27,26.5 27.5,26.5 ; 27,30.5 27.5,30.5 ; 28.5,26.5 29,26.5 ; 28.5,30.5 29,30.5 ; 30,26.5 30.5,26.5 ; 30,30.5 30.5,30.5 ; 31.5,26.5 32,26.5 ; 31.5,30.5 32,30.5 ; 33,26.5 33.5,26.5 ; 33,30.5 33.5,30.5 ; 34.5,26.5 35,26.5 ; 34.5,30.5 35,30.5 ; 36,26.5 36.5,26.5 ; 36,30.5 36.5,30.5 ; 37.5,26.5 38,26.5 ; 37.5,30.5 38,30.5 ; 39,26.5 39.5,26.5 ; 39,30.5 39.5,30.5 ; 40.5,26.5 41,26.5 ; 40.5,30.5 41,30.5 ; 42,26.5 42.5,26.5 ; 42,30.5 42.5,30.5 ; 43.5,26.5 44,26.5 ; 43.5,30.5 44,30.5 ; 45,26.5 45.5,26.5 ; 45,30.5 45.5,30.5 ; 46.5,26.5 47,26.5 ; 46.5,30.5 47,30.5 ; 48,26.5 48.5,26.5 ; 48,30.5 48.5,30.5 ; 49.5,26.5 50,26.5 ; 49.5,30.5 50,30.5 ; 51,26.5 51.5,26.5 ; 51,30.5 51.5,30.5 ; 52.5,26.5 53,26.5 ; 52.5,30.5 53,30.5 ; 54,26.5 54.5,26.5 ; 54,30.5 54.5,30.5 ; 55.5,26.5 56,26.5 ; 55.5,30.5 56,30.5 ; 57,26.5 57.5,26.5 ; 57,30.5 57.5,30.5 ; 58.5,26.5 59,26.5 ; 58.5,30.5 59,30.5 ; 60,26.5 60.5,26.5 60,26.5 ; 60,30.5 60.5,30.5 60,30.5 ; 61.5,26.5 62,26.5 61.5,26.5 ; 61.5,30.5 62,30.5 61.5,30.5 ; 63,26.5 63.5,26.5 63,26.5 ; 63,30.5 63.5,30.5 63,30.5
  lines w0.254: 19.978,41.1 19.978,39.8 23.678,36.1 ; 19.978,43.8 19.978,45.1 ; 20,43.8 20,45.1 20,48 36,64 41,64 43,64 44,63 ; 28.978,41.1 28.978,39.8 28.978,37.7 30.378,36.3 ; 29,43.8 29,45.1 ; 29,45 29,46 37,54 ; 37.278,22.5 38.778,21 38.778,19.8 ; 42,57 40,57 37,54 ; 43.223,19.8 43.223,21 43.223,22.455 ; 56,63 57,64 59,64 64,64 80,48 80,45.1 80,43.8 ; 56.755,19.8 56.755,21 56.755,22.455 ; 58,57 60,57 63,54 ; 61.2,19.8 61.2,21 62.7,22.5 ; 69.6,36.3 71,37.7 71,39.8 71,41.1 ; 71,43.8 71,45.1 ; 71,45 71,46 63,54 ; 76.3,36.1 80,39.8 80,41.1 ; 37,54 37,54 ; 63,54 63,54
  lines w0.8: 41.978,36.1 41.978,42.4 ; 42,48.6 42,49 44,51 ; 47.668,19.8 47.678,22.5 ; 52.3,22.5 52.31,19.8 ; 56,51 58,49 58,48.6 ; 58,36.1 58,42.4
  lines w1: 10.5,22.5 90,22.5 ; 10.5,36 90,36
  text "ISP" at 65.9,75 h3
  text "UVIC FORMULA MOTORSPORT" at 63.5,31.5 h2.5
  text "POWER DISTRIBUTION UNIT" at 63.5,27.5 h2
  text "2015-12-16" at 43,24 h1.5
  text "DATE:" at 50,24 h1.5
  text "5" at 53.5,24 h1.5
  text "REVISION:" at 63.5,24 h1.5
  text "PDU" at 90,24 h10
  text "BOARD NUMBER" at 24,15.5 h1.3
  text "LC1" at 39.8,14.3 h1
  text "LC2" at 44.5,14.3 h1
  text "HC1" at 48.8,14.3 h1
  text "HC2" at 53.5,14.3 h1
  text "LC3" at 57.8,14.3 h1
  text "LC4" at 62.3,14.3 h1
  text "GND" at 62.4,8 h1
  text "IO3" at 39.8,7.9 h1
  text "IO2" at 44.3,7.9 h1
  text "IO1" at 48.5,7.9 h1
  text "C-" at 53.2,7.9 h1
  text "C+" at 57.6,7.9 h1
Mechanical 29:
  lines w0.254: 0,10 10,0 90,0 100,10 100,80 90,90 10,90 0,80 0,10

## Text inside footprints (layer, text, board x,y; h text height)
J2: Mechanical 29 "M5" at 48.75,51.75 h1.52
MH1: Mechanical 29 "M3" at 8.75,84.5 h1.52
MH2: Mechanical 29 "M3" at 8.75,14.5 h1.52
MH3: Mechanical 29 "M3" at 88.75,14.5 h1.52
MH4: Mechanical 29 "M3" at 88.75,84.5 h1.52